# Altium PCB PCB1.PcbDoc
Units mil, origin at the board's own origin, x right, y up, seen from the top; angles counter-clockwise.
Board outline 2854.86 x 886.36 mil, 2 copper layers (Top Layer, Bottom Layer); 46 components, 19 nets, 137 pads, 22 vias.
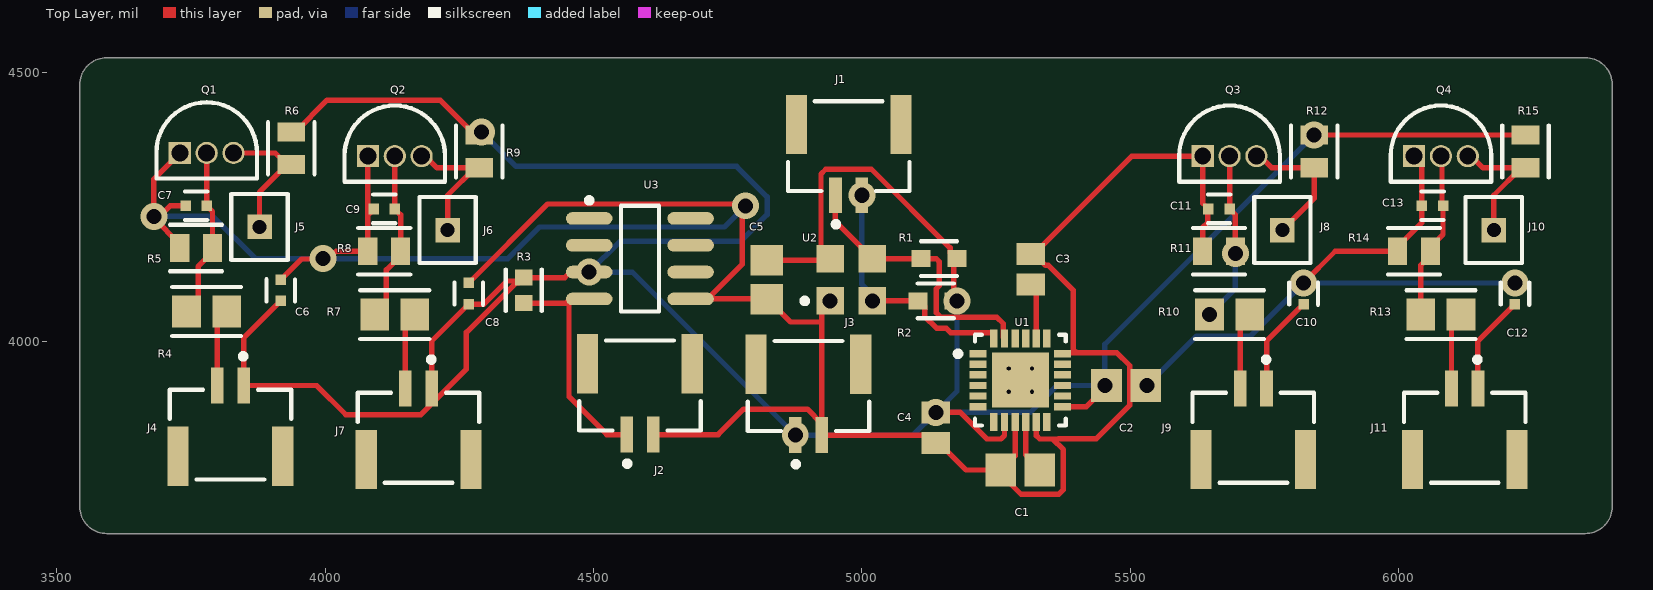
[diagram p0: Top Layer view]
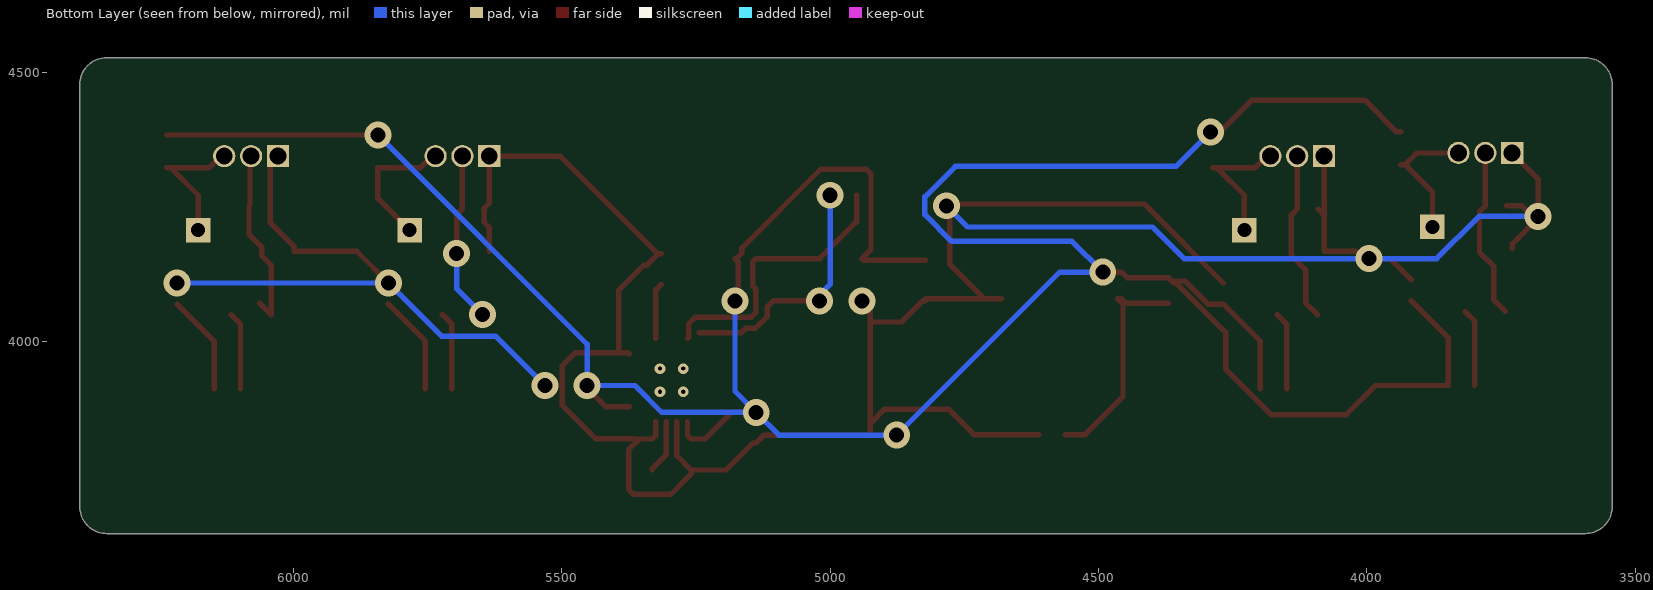
[diagram p1: Bottom Layer view, seen from below]
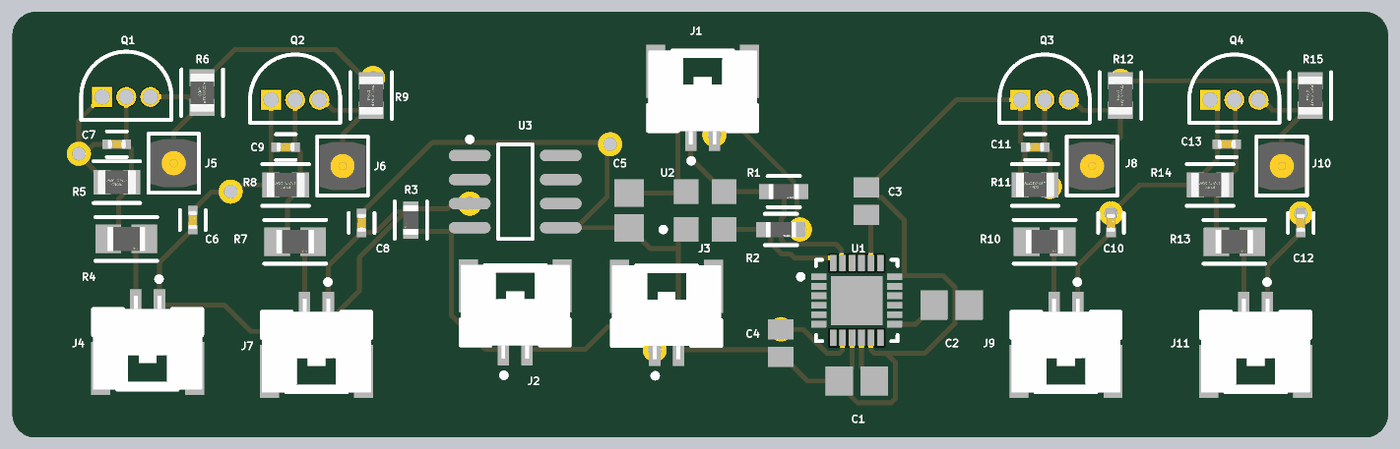
[diagram p2: 3D render of the assembled board from above, using the file's embedded part models]

## Layer stack, top to bottom
Top Solder: solder mask 0.4, Solder Resist, Dk 3.5
Top Layer: signal copper 1.4
Dielectric 1: dielectric 12.6, FR-4, Dk 4.8
Bottom Layer: signal copper 1.4
Bottom Solder: solder mask 0.4, Solder Resist, Dk 3.5

## Board outline
3593.31,3641.47 cw(c3593.31,3691.73) 3543.04,3691.73 3543.04,4477.56 cw(c3593.31,4477.56) 3593.31,4527.82 3818.9,4527.82 3602.36,4527.82 6347.64,4527.82 cw(c6347.64,4477.56) 6397.9,4477.56 6397.9,3691.73 cw(c6347.64,3691.73) 6347.64,3641.47

## Design rules (kind name [scope] priority, off if disabled: settings)
Clearance [All] p1: gap=10 ignorepadtopadclearanceinfootprint=FALSE
PolygonConnect [All] p1: connectstyle=Relief reliefconductorwidth=10 reliefentries=4 polygonreliefangle="90 Angle" airgapwidth=10
RoutingVias [All] p1: holewidth=28 width=50 viastyle="Through Hole" minholewidth=28 minwidth=50 maxholewidth=28 maxwidth=50
SolderMaskExpansion [All] p1: expansion=0 istentingtop=FALSE
SupplyNets "Schematic Supply Nets_1" [InNet('+3V3')] p1: voltage=0.000
SupplyNets "Schematic Supply Nets" [InNet('GND')] p2: voltage=0.000
Width [All] p1: maxlimit=10 minlimit=10 preferedwidth=10
30 further rules are at their usual default settings.

## Components (designator, comment, footprint, x,y, rotation, side; value= is the part's Value field where it differs from the comment)
C1 "0.1uF" CAPC2013X145X50ML20T20 5295.28,3759.84 r180 top
C2 "0.1uF" CAPC2013X145X50ML20T20 5492.13,3917.32 r0 top
C3 "2.2nF" CAPC2013X145X50LL20T20 5314.96,4133.86 r90 top
C4 "10nF" CAPC2013X145X50LL20T20 5137.8,3838.58 r270 top
C5 "100nF" CAPC2013X145X50ML20T20 4822.83,4114.17 r270 top
C6 "0.1uF" FP-CC0402-MFG 3917.32,4094.49 r90 top value="100 nF"
C7 "0.1uF" FP-CC0402-MFG 3759.84,4251.97 r180 top value="100 nF"
C8 "0.1uF" FP-CC0402-MFG 4267.72,4088.58 r90 top value="100 nF" (schematic designator C6)
C9 "0.1uF" FP-CC0402-MFG 4110.24,4246.06 r180 top value="100 nF" (schematic designator C7)
C10 "0.1uF" FP-CC0402-MFG 5822.83,4088.58 r90 top value="100 nF" (schematic designator C6)
C11 "0.1uF" FP-CC0402-MFG 5665.35,4246.06 r180 top value="100 nF" (schematic designator C7)
C12 "0.1uF" FP-CC0402-MFG 6216.54,4088.58 r90 top value="100 nF" (schematic designator C6)
C13 "0.1uF" FP-CC0402-MFG 6062.99,4251.97 r180 top value="100 nF" (schematic designator C7)
J1 "BM02B-GHS-TBT(LF)(SN)" FP-BM02B-GHS-TBT_LF_SN-MFG 4975.39,4363.19 r180 top
J2 "BM02B-GHS-TBT(LF)(SN)" FP-BM02B-GHS-TBT_LF_SN-MFG 4586.61,3917.32 r180 top
J3 "BM02B-GHS-TBT(LF)(SN)" FP-BM02B-GHS-TBT_LF_SN-MFG 4900.59,3916.34 r180 top
J4 "BM02B-GHS-TBT(LF)(SN)" FP-BM02B-GHS-TBT_LF_SN-MFG 3823.82,3825.79 r0 top
J5 "BBL-101-G-E" FP-BBL-101-G-E-MFG 3877.95,4212.6 r90 top
J6 "BBL-101-G-E" FP-BBL-101-G-E-MFG 4228.35,4206.69 r90 top (schematic designator J5)
J7 "BM02B-GHS-TBT(LF)(SN)" FP-BM02B-GHS-TBT_LF_SN-MFG 4174.21,3819.88 r0 top (schematic designator J4)
J8 "BBL-101-G-E" FP-BBL-101-G-E-MFG 5783.46,4206.69 r90 top (schematic designator J5)
J9 "BM02B-GHS-TBT(LF)(SN)" FP-BM02B-GHS-TBT_LF_SN-MFG 5729.33,3819.88 r0 top (schematic designator J4)
J10 "BBL-101-G-E" FP-BBL-101-G-E-MFG 6177.17,4206.69 r90 top (schematic designator J5)
J11 "BM02B-GHS-TBT(LF)(SN)" FP-BM02B-GHS-TBT_LF_SN-MFG 6123.03,3819.88 r0 top (schematic designator J4)
Q1 "2N3904BU" FAIR-TO-92 3729.53,4350.39 r0 top
Q2 "2N3904BU" FAIR-TO-92 4079.92,4344.49 r0 top (schematic designator Q1)
Q3 "2N3904BU" FAIR-TO-92 5635.04,4344.49 r0 top (schematic designator Q1)
Q4 "2N3904BU" FAIR-TO-92 6028.74,4344.49 r0 top (schematic designator Q1)
R1 "10k" FP-AC0603-MFG 5143.7,4153.54 r0 top
R2 "10k" FP-AC0603-MFG 5137.8,4074.8 r0 top
R3 "TFCR0603-16W-K-4701FT" FP-TFCR0603-IPC_C 4370.08,4094.49 r90 top
R4 "1k" FP-TFCR0805-IPC_A 3779.53,4055.12 r180 top
R5 "15k" FP-CRGCQ0805-IPC_C 3759.84,4173.23 r180 top value=15KΩ
R6 "10k" FP-CRGCQ0805-IPC_C 3937.01,4359.21 r90 top value=10KΩ
R7 "1k" FP-TFCR0805-IPC_A 4129.92,4049.21 r180 top (schematic designator R4)
R8 "15k" FP-CRGCQ0805-IPC_C 4110.24,4167.32 r180 top value=15KΩ (schematic designator R5)
R9 "10k" FP-CRGCQ0805-IPC_C 4287.4,4353.3 r90 top value=10KΩ (schematic designator R6)
R10 "1k" FP-TFCR0805-IPC_A 5685.04,4049.21 r180 top (schematic designator R4)
R11 "15k" FP-CRGCQ0805-IPC_C 5665.35,4167.32 r180 top value=15KΩ (schematic designator R5)
R12 "10k" FP-CRGCQ0805-IPC_C 5842.52,4353.3 r90 top value=10KΩ (schematic designator R6)
R13 "1k" FP-TFCR0805-IPC_A 6078.74,4049.21 r180 top (schematic designator R4)
R14 "15k" FP-CRGCQ0805-IPC_C 6028.5,4167.32 r180 top value=15KΩ (schematic designator R5)
R15 "10k" FP-CRGCQ0805-IPC_C 6236.22,4353.3 r90 top value=10KΩ (schematic designator R6)
U1 "MPU-6050" IS-QFN-24_V 5295.28,3927.17 r0 top
U2 "MS583730BA01-50" TECO-MS583730BA01-50_V 4980.31,4114.17 r90 top
U3 "DS18B20Z" MAXM-S8-2_N 4586.61,4153.54 r0 top

## Footprints (in the part's own frame and the unit in brackets; to place one, negate y for a bottom-side part, rotate by r counter-clockwise, add the part's x,y. Pads: shape width x height; smd on the part's side, far side on the other; paste and mask are expansions set on the pad)
CAPC2013X145X50LL20T20 [mm] "Chip Capacitor, 2-Leads, Body 2.00x1.25mm, IPC High Density"
  rect 1.05x1.35 smd: 1(-0.725,0) 2(0.725,0)
  body extent -1.1,-0.72 1.1,0.72, height 1.45
CAPC2013X145X50ML20T20 [mm] "Chip Capacitor, 2-Leads, Body 2.00x1.25mm, IPC Low Density"
  rect 1.45x1.55 smd: 1(-0.925,0) 2(0.925,0)
  body extent -1.1,-0.72 1.1,0.72, height 1.45
FAIR-TO-92 [mm] "TO, 3-Leads, Body Dia 4.79mm, Pitch 1.27mm"
  rect 1.05x1.05 hole 0.8 mask+0.05: 1(0,0)
  round 1.05 hole 0.8 mask+0.05: 2(1.27,0) 3(2.54,0)
  silkscreen extent -1.11,-1.21 3.65,2.4, body extent -1.11,-1.21 3.65,2.4, height 5.33
FP-AC0603-MFG [mm]
  rect 0.9x0.8 smd paste+0 mask+0: 1(-0.85,0) 2(0.85,0)
  silkscreen extent -0.85,-0.82 0.85,0.82, body extent -1.4,-0.55 1.4,0.55, height 0.25
FP-BBL-101-G-E-MFG [mm]
  rect 1.16x1.16 hole 0.66 paste-2539.97 mask+0: 1(0,0)
  silkscreen extent -1.56,-1.33 1.56,1.33, body extent -1.66,-1.43 1.66,1.43, height 0.25
FP-BM02B-GHS-TBT_LF_SN-MFG [mm]
  rect 0.6x1.7 smd paste+0 mask+0: 1(0.625,2.325) 2(-0.625,2.325)
  rect 1x2.8 smd paste+0 mask+0: 3(-2.475,-1.025) 4(2.475,-1.025)
  silkscreen extent -2.88,-2.12 2.88,3.82, body extent -3.08,-2.52 3.08,3.27, height 0.25
FP-CC0402-MFG [mm]
  rect 0.5x0.5 smd paste+0 mask+0: 1(-0.5,0) 2(0.5,0)
  silkscreen extent -0.53,-0.68 0.53,0.67, body extent -0.87,-0.48 0.87,0.48, height 0.25
FP-CRGCQ0805-IPC_C [mil]
  rect 35.67x51.57 smd paste+0 mask+0: 1(-30.55,0) 2(30.55,0)
  silkscreen extent -48,-43 48,43, body extent -52,-31 52,31, height 10
FP-TFCR0603-IPC_C [mil]
  rect 29.85x31.97 smd paste+0 mask+0: 1(-23.7,0) 2(23.7,0)
  silkscreen extent -39,-33 39,33, body extent -43,-22 43,22, height 10
FP-TFCR0805-IPC_A [mil]
  rect 53.38x59.38 smd paste+0 mask+0: 1(-37.45,0) 2(37.45,0)
  silkscreen extent -64,-45 64,45, body extent -84,-49 84,49, height 10
IS-QFN-24_V [mm] "QFN, 24-Leads, Body 4x4mm, Pitch 0.5mm, Thermal Pad 2.7x2.6mm"
  rect 0.8x0.35 smd: 1(-2,1.25) 2(-2,0.75) 3(-2,0.25) 4(-2,-0.25) 5(-2,-0.75) 6(-2,-1.25) 13(2,-1.25) 14(2,-0.75) 15(2,-0.25) 16(2,0.25) 17(2,0.75) 18(2,1.25)
  rect 0.35x0.85 smd mask+0.102: 7(-1.25,-1.975) 8(-0.75,-1.975) 9(-0.25,-1.975) 10(0.25,-1.975) 11(0.75,-1.975) 12(1.25,-1.975) 19(1.25,1.975) 20(0.75,1.975) 21(0.25,1.975) 22(-0.25,1.975) 23(-0.75,1.975) 24(-1.25,1.975)
  rect 2.7x2.6 smd: 25(0,0)
  silkscreen extent -3.07,-2.15 2.15,2.15, body extent -2,-2 2,2, height 0.95
MAXM-S8-2_N [mm] "SOIC, 8-Leads, Body 4.90x3.90mm, Pitch 1.27mm, IPC Medium Density"
  oval 2.2x0.6 smd: 1(-2.4,1.905) 2(-2.4,0.635) 3(-2.4,-0.635) 4(-2.4,-1.905) 5(2.4,-1.905) 6(2.4,-0.635) 7(2.4,0.635) 8(2.4,1.905)
  silkscreen extent -2.52,-2.5 0.9,2.88, body extent -2,-2.5 2,2.5, height 1.75
TECO-MS583730BA01-50_V [mm] "SMD, 4-Leads, Body 3.3x3.3mm, Pitch 2mm"
  rect 1.3x1.3 smd: 1(-1,1) 2(1,1) 3(1,-1) 4(-1,-1)
  silkscreen extent -1.12,2.07 -0.88,2.32, body extent -1.65,-1.65 1.65,1.65, height 2.75

## Part data
C1 C2 C5: library part CMP-2007-01444-1, Manufacturer=Vitramon, Part Number=VJ0805Y104KXQCW1BC
C3: library part CMP-2007-01454-1, Manufacturer=Vitramon, Part Number=VJ0805Y222KXQCW1BC
C4: library part CMP-1036-03809-2, Manufacturer=Vitramon, Part Number=VJ0805Y103KXQPW1BC
C6 C7 C8 C9 C10 C11 C12 C13: library part CMP-03422-000490-1, "CAP CER 0.1UF 6.3V X7R 0402", Capacitance="100 nF", Manufacturer=YAGEO, Manufacturer Part Number=CC0402KRX7R5BB104, Package=CC0402, Temperature="-55°C to +125°C", Temperature Characteristic=X7R, Temperature Coefficient=30ppm/°C, Temperature Range High=+125°C, Temperature Range Low=-55°C, Tolerance=0.1, Voltage Rating="6.3 V", Automotive=No, Automotive Grade=NA, Category=Cap, ComponentLink2Description=Datasheet, ComponentLink2URL=http://www.yageo.com/documents/recent/UPY-GP_NP0_16V-to-50V_16.pdf, Device Class L1="Passive Components", Device Class L2=Capacitors, Device Class L3="Ceramic Capacitors", Digikey Description="CAP CER 0.1UF 6.3V X7R 0402", Footprint Url=http://www.yageo.com/exep/pages/download/literatures/UPY-C_GEN_24.pdf, Height=0.55mm, Ipc Land Pattern Name=CAPC10050X50, Lead Free=Yes, Material=Ceramic, Mouser Description="0402 0.1 uF 6.3 V ±10% Tolerance X7R Multilayer Ceramic Capacitor", Octopart=https://octopart.com/cc0402krx7r5bb104-yageo-57080752, RoHS=TRUE
J1 J2 J3 J4 J7 J9 J11: library part CMP-17439-000221-2, "CONN HEADER SMD 2POS 1.25MM", Current Rating=1A, Housing Color=Natural, Max Operating Temperature=85°C, Min Operating Temperature=-25°C, Voltage Rating=50V, Contact Material="Copper, Tin", Contact Plating=Tin, Height=4.05mm, Housing Material=Nylon, Lead Free="Lead Free", Lead Pitch=1.25mm, NexarPartId=289277, Number of Contacts=2, Number of Positions=2, Number of Rows=1, Orientation=Straight, Packaging="Cut Tape", Pitch=1.25mm, REACH SVHC="No SVHC", RoHS=Compliant, Termination=SMD/SMT, Voltage Rating (AC)=50V, Wire/Cable Gauge=26AWG
J5 J6 J8 J10: library part CMP-00575-00271154-1, "BBL-101-G-E Conn Unshrouded Header HDR 1 POS Solder ST Top Entry Thru-Hole Bulk", Color=Black, Manufacturer Lifecycle Status=PRODUCTION, Max Operating Temperature=125°C, Min Operating Temperature=-55°C, Contact Material="Brass, Bronze, Gold", Contact Mating Length=2.667mm, Contact Plating=Gold, Depth=2.54mm, Gender=Male, Height=4.572mm, Housing Color=Black, Housing Material=Polyester, Lead Free="Lead Free", Length=2.54mm, Lifecycle Status=Production, Mount="Through Hole", NexarPartId=271154, Number of Contacts=1, Number of Positions=1, Number of Rows=1, Orientation=Straight, Radiation Hardening=No, REACH SVHC="No SVHC", RoHS=Compliant, Termination=Solder, Width=2.54mm
Q1 Q2 Q3 Q4: library part CMP-2000-04944-1, "NPN General-Purpose Amplifier, 40 V VCEO, 0.2 A, -55 to 150 degC, 2-Pin TO-92, RoHS, Bulk", Manufacturer=FairchildSemiconductor, Maximum Collector Base Voltage=60V, Maximum Collector Emitter Saturation Voltage=0.2@1mA@10mA, Maximum Collector Emitter Voltage=40V, Maximum DC Collector Current=0.2A, Maximum Operating Frequency=300(Min)MHz, Maximum Power Dissipation=625mW, Minimum DC Current Gain=40@0.1mA@1V, Operating Temperature=-55to150degC, Package=3TO-92, Package Description="3-Pin Transistor Outline Package, Body Dia 4.79 mm, Pitch 1.27 mm", Package Reference=TO-92, Category=GPBJT, Datasheet URL=https://datasheet.ciiva.com/4722/2n3904-82270-4722369.pdf, Datasheet Version="Rev. 1.1.0, 10/2014", Manufacturer URL=https://www.fairchildsemi.com/, Mounting=ThroughHole, Packaging=Bulk, Pin Count=3, Rad Hard=No, Type=NPN
R1 R2: library part CMP-03412-038553-1, "RES 10kΩ 1.00% 0.2W 0603"
R3: library part CMP-250906-196530-1, "RES Thin Film,  4.7kΩ, 1%, 0.1W, 100ppm/°C, 0603"
R4 R7 R10 R13: library part CMP-250906-148809-1, "RES Thin Film,  1kΩ, 0.1%, 0.1W, 25ppm/°C, 0805"
R5 R8 R11 R14: library part CMP-03211-008083-1, "CRGCQ 0805 15K 1%", Ambient Temperature Range High=+70°C, Manufacturer="TE Connectivity", Manufacturer Part Number=CRGCQ0805F15K, Package=CRGCQ0805, Power Rating=0.125W, Resistance=15KΩ, Temperature="-55°C to +155°C", Temperature Coefficient=±100ppm/°C, Temperature Range High=+155°C, Temperature Range Low=-55°C, Tolerance=0.01, Voltage Rating=150V, Automotive=Yes, Automotive Grade="Grade 949", Category=Res, ComponentLink2Description=Datasheet, ComponentLink2URL=https://www.te.com/commerce/DocumentDelivery/DDEController?Action=showdoc&DocId=Data+Sheet%7F1773204-3%7F1%7Fpdf%7FEnglish%7FENG_DS_1773204-3_1.pdf%7F4-2176341-958, Composition="Thick Film", Device Class L1="Passive Components", Device Class L2=Resistors, Device Class L3="Chip SMD Resistors", Digikey Description="CRGCQ 0805 15K 1%", Height=0.65mm, Ipc Land Pattern Name=RESC200125X55, Lead Free=Yes, Octopart=https://octopart.com/crgcq0805f15k-te+connectivity-91018148, RoHS=TRUE, Series=CRGCQ
R6 R9 R12 R15: library part CMP-03211-002989-1, "CRGCQ 0805 10K 5%", Ambient Temperature Range High=+70°C, Manufacturer="TE Connectivity", Manufacturer Part Number=CRGCQ0805J10K, Package=CRGCQ0805, Power Rating=0.125W, Resistance=10KΩ, Temperature="-55°C to +155°C", Temperature Coefficient=±100ppm/°C, Temperature Range High=+155°C, Temperature Range Low=-55°C, Tolerance=0.05, Voltage Rating=150V, Automotive=Yes, Automotive Grade="Grade 914", Category=Res, ComponentLink2Description=Datasheet, ComponentLink2URL=https://www.te.com/commerce/DocumentDelivery/DDEController?Action=showdoc&DocId=Data+Sheet%7F1773204-3%7F1%7Fpdf%7FEnglish%7FENG_DS_1773204-3_1.pdf%7F4-2176341-923, Composition="Thick Film", Device Class L1="Passive Components", Device Class L2=Resistors, Device Class L3="Chip SMD Resistors", Digikey Description="CRGCQ 0805 10K 5%", Height=0.65mm, Ipc Land Pattern Name=RESC200125X55, Lead Free=Yes, Mouser Description="Res Thick Film 0805 10K Ohm 5% 0.125W(1/8W) ±100ppm/C Pad SMD Automotive T/R", Octopart=https://octopart.com/crgcq0805j10k-te+connectivity-91018201, RoHS=TRUE, Series=CRGCQ
U1: library part CMP-1753-00002-2, "3-Axis Gyroscope, Accelerometer and a Digital Motion Processor(TM) (DMP), 2.375 to 3.46 V, -40 to 85 degC, 24-Pin QFN, RoHS, Tape and Reel", Manufacturer=InvenSense, Standard Package=5,000, Category=Sensors,Transducers, Datasheet URL=http://datasheet.octopart.com/MPU-6050-InvenSense-datasheet-14421344.pdf, Datasheet Version="Rev. 3.3, 05/2012", Dynamic Catalog=MPU-6000™Series, Family=Multifunction, Featured Product=MPU-60506-Axis,IntegratedI²CSolution, Manufacturer URL=http://www.invensense.com/, Online Catalog=MPU-6000™Series, Other Names="1428-1007-2 / MPU6050", Output Type=Digital, Sensor Type=MotionTracking, Unit PriceUSD=Digital
U2: library part CMP-1684-00024-1, "Ultra Small Gel Filled Pressure Sensor, 1.5 to 3.6 V, -20 to 85 degC, 4-Pin SMD, RoHS, Tape and Reel", Manufacturer="TE Connectivity", Package Description="4-Pin Surface Mount Device, Body 3.3 x 3.3 mm, Pitch 2 mm", Package Reference=SMD, Datasheet URL=http://www.te.com/commerce/DocumentDelivery/DDEController?Action=srchrtrv&DocNm=MS5837-30BA&DocType=Data+Sheet&DocLang=English, Manufacturer URL=http://www.te.com, Mounting Technology=SurfaceMount
U3: library part CMP-0253-00023-2, "High-Precision 1-Wire Digital Thermometer, -55 to 125 degC, 8-Pin SOIC (S8-2)", Generic Part Number=DS18B20, Temp. Thresh.="Programmable (NV)", Code_JEDEC=MS012, ComponentLink1Description="Manufacturer URL", ComponentLink1URL=http://www.maximintegrated.com/, ComponentLink2Description=Datasheet, ComponentLink2URL=http://datasheets.maximintegrated.com/en/ds/DS18B20.pdf, ComponentLink3Description="Package Specification", ComponentLink3URL=http://pdfserv.maximintegrated.com/package_dwgs/21-0041.PDF, DatasheetVersion="Rev. 4", Interface=1-Wire, Mounting Technology="Surface Mount", Multi Droppable=Yes, PackageDescription="8-Pin Small-Outline IC, Narrow (0.15in) (S8-2), Body 4.90 x 3.90 mm, Pitch 1.27 mm", PackageReference=S8-2, PackageVersion="Rev. D, 10/2012", Parasite Pwr.=Yes, PartNumber=DS18B20Z, Sensor Type=Local

## Via types
v1: diameter 50, hole 28, Top Layer to Bottom Layer, 18 vias
v2: diameter 19.68, hole 7.87, Top Layer to Bottom Layer, 4 vias

## Nets (pads, with @x,y where several pads share a name; then routed paths per layer and width w, separated by ;. In a path a pad name is that pad's centre, name@x,y a point inside that pad or via, vN(x,y) a via of type N, cw(c..) or ccw(c..) an arc to the next point about the centre after c; other vN are vias at no path point)
+3V3: C2.1 C4.1 C5.1 C6.1 C8.1 J3.1 J4.1 J7.1 R1.2 R2.2 R3.2 R6.2 R9.2 R12.2 R15.2 U1.8 U1.13 U2.2 U3.3 | length 5847.1
  Top Layer w10: C6.1 3848.43,4005.91 J4.1 3984.25,3917.32 4038.62,3862.95 4178.64,3862.95 4263.26,3947.57 4263.26,4016.09 4355.43,4108.26 4360.15,4108.26 R3.2@4363.74,4111.85 ; R6.2 3944.96,4389.76 4004.01,4448.82 4214.49,4448.82 4279.45,4383.86 R9.2 ; C8.1 4296.14,4068.9 4339.09,4111.85 R3.2@4363.74,4111.85 ; v1(4492.13,4128.54) 4456.94,4128.54 4446.59,4118.19 R3.2 R3.2@4363.74,4111.85 ; C5.1 4937.99,4150.59 U2.2 4923.98,4170.51 4923.98,4311.33 4932.76,4320.12 5018.02,4320.12 5164.45,4173.69 5164.45,4164.29 5175.2,4153.54 R1.2 5171.26,4147.64 R2.2 ; v1(5137.8,3867.13) 5183.51,3867.13 5232.96,3817.68 5259.17,3817.68 5265.75,3824.26 ; 5265.75,3828.74 U1.8 ; U1.13 5418.31,3877.95 5455.71,3915.35 C2.1 ; v1(5842.52,4383.86) R15.2
  Bottom Layer w10: v1(4291.34,4389.76) 4355.78,4325.32 4766.68,4325.32 4823.46,4268.54 4823.46,4235.4 4773.86,4185.8 4549.38,4185.8 v1(4492.13,4128.54) 4572.24,4128.54 v1(4875.98,3824.8) 5095.47,3824.8 v1(5137.8,3867.13) ; v1(5177.17,4074.8) 5177.17,3906.5 v1(5137.8,3867.13) ; v1(5842.52,4383.86) 5452.76,3994.09 v1(5452.76,3917.32) 5363.87,3917.32 5313.68,3867.13 v1(5137.8,3867.13)
GND: C1.2 C2.2 C3.2 C4.2 C5.2 C6.2 C7.2 C8.2 C9.2 C10.2 C11.2 C12.2 C13.2 J2.2 J3.2 Q1.1 Q2.1 Q3.1 Q4.1 R5.2 R8.2 R11.2 R14.2 U1.9 U1.11 U1.18 U2.1 U3.5 | length 6587.6
  Top Layer w10: R5.2 3729.29,4181.18 3681.1,4229.36 v1(3681.1,4232.28) ; Q1.1 3681.1,4301.97 v1(3681.1,4232.28) ; C7.2 3711.61,4251.97 3691.93,4232.28 v1(3681.1,4232.28) ; C6.2 3956.06,4152.91 3995.43,4152.91 v1(3996.06,4153.54) 4006.89,4153.54 4020.67,4167.32 R8.2 4079.68,4344.25 Q2.1 ; 4079.68,4235.19 C9.2 ; C8.2 4414.8,4255.35 4780.08,4255.35 v1(4783.46,4251.97) 4777.32,4245.83 4777.32,4143.27 U3.5@4712.6,4078.54 ; J2.2 4732.28,3825.79 4779.76,3873.27 4898.39,3873.27 J3.2@4925.2,3846.46 ; U3.5 U3.5@4712.6,4078.54 ; C5.2@4822.83,4074.8 4827.76,4074.8 4867.13,4035.43 4925.2,4035.43 ; C5.2 4822.05,4078.54 U3.5@4712.6,4078.54 ; v1(4940.94,4074.8) 4925.2,4059.05 4925.2,4035.43 ; U1.9 5285.43,3786.42 C1.2 ; C3.2 C3.2@5320.87,4162.4 ; 5324.8,3828.74 U1.11 ; 5325.12,3824.26 5325.12,3823.94 5331.39,3817.68 5355.35,3817.68 ; U1.18 5376.22,3978.58 5399.56,3978.58 ; R11.2 5634.8,4211.65 5644.37,4221.22 5644.37,4244.76 C11.2 5635.04,4256.69 Q3.1 5502.95,4344.49 C3.2@5320.87,4162.4 ; v1(5822.83,4108.27) 5881.89,4167.32 R14.2 5997.95,4175.27 6043.31,4220.63 C13.2 6043.31,4329.92 Q4.1 ; J3.2@4925.2,3846.46 4925.2,4035.43 ; J3.2@4925.2,3846.46 J3.2 5123.03,3824.8 C4.2 5143.7,3810.04 5193.9,3759.84 C1.2 ; C1.2 5258.86,3752.41 5296.94,3714.33 5366.45,3714.33 5375.24,3723.12 5375.24,3797.79 5355.35,3817.68 ; C3.2@5320.87,4162.4 5342.28,4140.98 5347.75,4140.98 5393.7,4095.03 5393.7,3984.44 5399.56,3978.58 ; 5355.35,3817.68 5366.84,3817.68 5366.95,3817.79 5436.44,3817.79 5499.25,3880.6 5499.25,3954.05 5474.72,3978.58 5399.56,3978.58
  Bottom Layer w10: v1(3681.1,4232.28) 3791.39,4232.28 3870.13,4153.54 v1(3996.06,4153.54) 4340.55,4153.54 4399.61,4212.6 4744.09,4212.6 v1(4783.46,4251.97) ; v1(5531.5,3917.32) 5623.39,4009.21 5723.78,4009.21 v1(5822.83,4108.27) v1(6216.54,4108.27)
NetC1_1: C1.1 U1.10 | length 100.6
  Top Layer w10: U1.10 5305.12,3788.39 5331.69,3761.81 C1.1
NetC3_1: C3.1 U1.20 | length 104.5
  Top Layer w10: C3.1 5324.8,4095.47 U1.20
NetC7_1: C7.1 Q1.2 R4.2 R5.1 | length 319.8
  Top Layer w10: R4.2 3763.76,4076.81 3763.76,4138.65 3790.4,4165.28 R5.1 3790.4,4241.1 C7.1 Q1.2
NetC7_2: C9.1 Q2.2 R7.2 R8.1 | length 265.8
  Top Layer w10: R7.2@4114.16,4070.9 4114.16,4132.74 R8.1@4140.79,4159.38 ; C9.1 Q2.2 ; R8.1 4140.79,4235.19
NetC7_3: C11.1 Q3.2 R10.2 R11.1 | length 315.8
  Top Layer w10: Q3.2 C11.1 5695.91,4235.19 R11.1
  Bottom Layer w10: v1(5647.59,4049.21) 5695.91,4097.53 v1(5695.91,4163.35)
NetC7_4: C13.1 Q4.2 R13.2 R14.1 | length 314
  Top Layer w10: R13.2 6041.29,4141.61 6059.06,4159.38 R14.1 6059.06,4175.27 6082.68,4198.89 C13.1 6080.71,4253.94 6080.71,4342.52 Q4.2
NetJ1_1: J1.1 R1.1 U1.23 U2.3 | length 532.9
  Top Layer w10: J1.1 4950.79,4222.44 U2.3 5138.59,4153.54 5144.45,4147.69 5144.45,4103.22 5138.54,4097.31 5138.54,4052.84 5147.33,4044.05 5251.76,4044.05 5263.54,4032.28 5263.54,4007.13 U1.23
NetJ1_2: J1.2 R2.1 U1.24 U2.4 | length 463.9
  Top Layer w10: v1(5019.69,4074.8) 5106.3,4074.8 5117.05,4064.05 5117.05,4046.05 5139.05,4024.05 5157.05,4024.05 5165.35,4015.75 U1.24@5243.54,4015.75
  Bottom Layer w10: v1(5000,4271.65) 5000,4105.31 5019.69,4085.63 v1(5019.69,4074.8)
NetJ2_1: J2.1 R3.1 U3.4 | length 420.5
  Top Layer w10: R3.1 4449.19,4070.79 4456.94,4078.54 4464.32,4078.54 4454.49,4068.72 4454.49,3896.35 4525.05,3825.79 J2.1
NetJ4_2: J4.2 R4.1 | length 145.2
  Top Layer w10: J4.2 3799.21,4037.35 R4.1
NetJ4_3: J7.2 R7.1 | length 120
  Top Layer w10: J7.2 R7.1@4149.61,4031.45
NetJ4_4: J9.2 R10.1 | length 120
  Top Layer w10: J9.2 R10.1@5704.72,4031.45
NetJ4_5: J11.2 R13.1 | length 120
  Top Layer w10: J11.2 R13.1@6098.43,4031.45
NetJ5_1: J5.1 Q1.3 R6.1 | length 253.7
  Top Layer w10: Q1.3 3907.32,4350.39 R6.1@3929.06,4328.65 ; J5.1 3877.95,4277.55 R6.1@3929.06,4328.65 ; R6.1 R6.1@3929.06,4328.65
NetJ5_2: J6.1 Q2.3 R9.1 | length 261.7
  Top Layer w10: Q2.3 4186.89,4344.49 4208.63,4322.75 R9.1 4279.45,4322.75 4228.35,4271.64 J6.1
NetJ5_3: J8.1 Q3.3 R12.1 | length 257
  Top Layer w10: Q3.3 5742.01,4344.49 5763.74,4322.75 R12.1 5842.52,4265.75 J8.1
NetJ5_4: J10.1 Q4.3 R15.1 | length 261.7
  Top Layer w10: Q4.3 6135.71,4344.49 6157.45,4322.75 R15.1 6228.27,4322.75 6177.17,4271.64 J10.1
pads on no net: C10.1 C12.1 J1.3 J1.4 J2.3 J2.4 J3.3 J3.4 J4.3 J4.4 J7.3 J7.4 J9.1 J9.3 J9.4 J11.1 J11.3 J11.4 U1.1 U1.2 U1.3 U1.4 U1.5 U1.6 U1.7 U1.12 U1.14 U1.15 U1.16 U1.17 U1.19 U1.21 U1.22 U1.25 U3.1 U3.2 U3.6 U3.7 U3.8
copper on no net: | length 780.6
  Top Layer w10: 4092.47,4049.21 4114.16,4070.9 ; 4129.92,4246.06 4140.79,4235.19 ; 4140.79,4159.38 4140.79,4167.32 ; 4149.61,4031.45 4167.37,4049.21 ; 4198.82,3911.42 4198.82,4000 4267.72,4068.9 ; 4279.45,4322.75 4287.4,4322.75 ; 5647.59,4049.21 5669.28,4070.9 ; 5695.91,4159.38 5695.91,4167.32 ; 5704.72,4031.45 5722.49,4049.21 ; 5753.94,3911.42 5753.94,4000 5822.83,4068.9 ; 5834.57,4322.75 5842.52,4322.75 ; 6041.29,4049.21 6062.98,4070.9 ; 6098.43,4031.45 6116.19,4049.21 ; 6147.64,3911.42 6147.64,4000 6216.54,4068.9 ; 6228.27,4322.75 6236.22,4322.75
  other v2: 5273.62,3905.51 5316.93,3905.51 5273.62,3948.82 5316.93,3948.82

## Silkscreen, mask and mechanical layers (free items; w line width, h text height)
Mechanical 1:
  lines w0.5: 3602.36,4527.56 6347.64,4527.56 cw(c6347.64,4477.56) 6397.64,4477.56 6397.64,3691.73 cw(c6347.64,3691.73) 6347.64,3641.73 3593.31,3641.73 cw(c3593.31,3691.73) 3543.31,3691.73 3543.31,4477.56 cw(c3593.31,4477.56) 3593.31,4527.56 3818.9,4527.56